# Altium PCB NIXIEClock_151223.PcbDoc (part 3 of 3)
Units mil, origin at the board's own origin, x right, y up, seen from the top; angles counter-clockwise.
Board outline 8470 x 2600 mil, 2 copper layers (Top Layer, Bottom Layer); 115 components, 157 nets, 483 pads, 249 vias.
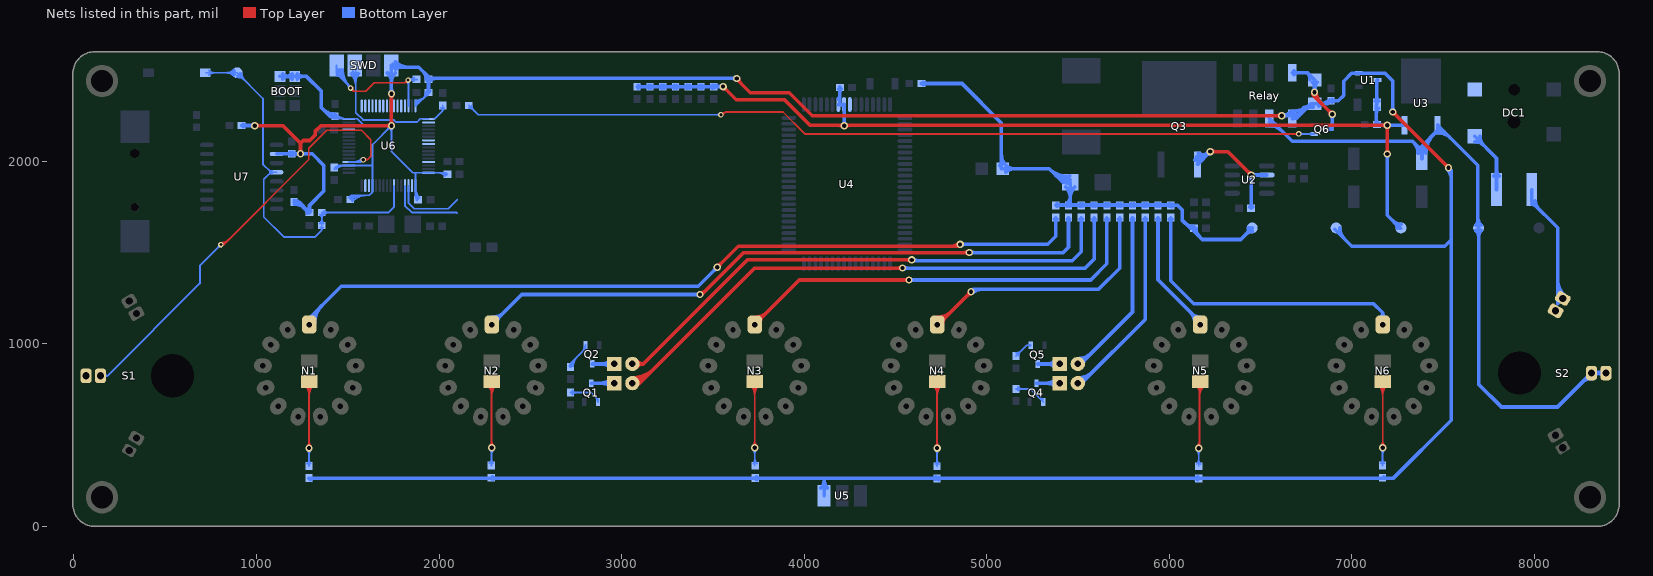
[diagram p3: the nets of this part, all layers, seen from the top]

## Via types
v1: diameter 30, hole 18, Top Layer to Bottom Layer, tented both sides, 204 vias
v2: diameter 40, hole 23, Top Layer to Bottom Layer, tented both sides, 35 vias
v3: diameter 30, hole 15, Top Layer to Bottom Layer, tented both sides, 10 vias

## Nets (pads, with @x,y where several pads share a name; then routed paths per layer and width w, separated by ;. In a path a pad name is that pad's centre, name@x,y a point inside that pad or via, vN(x,y) a via of type N, cw(c..) or ccw(c..) an arc to the next point about the centre after c; other vN are vias at no path point) (continued)
NetD3_1: D3.1 Q6.3 Relay.8 | length 894.1
  Top Layer w20: v2@6785,2378 ccw(c6816.38,2378) 6794.19,2355.81 ; v2@6788.18,2370.69 cw(c6773.55,2355) 6795,2355 ; v2(6795,2378) 6795,2355 ; v2@6801.82,2370.69 ccw(c6816.45,2355) 6795,2355 ; v2@6805,2378 ccw(c6884.67,2378) 6828.33,2321.67 ; v2@6882.31,2257.69 ccw(c6858.16,2257.69) 6875.24,2274.76 ccw(c6892.31,2291.84) v2@6892.31,2267.69 ; v2(6892.31,2257.69) 6795,2355
  Bottom Layer w20: Relay.8@6673,2485 6757,2485 ; Relay.8@6682.63,2475.37 cw(c6705.89,2452.11) 6705.89,2485 cw(c6705.89,2517.89) Relay.8@6682.63,2494.63 ; D3.1@6769.66,2447.38 ccw(c6725.44,2453.44) 6757,2485 ; D3.1@6784.63,2432.63 cw(c6759.58,2407.58) 6795,2407.58 ; v2@6787.93,2385.07 ccw(c6770.86,2402.14) 6795,2402.14 ccw(c6819.14,2402.14) v2@6802.07,2385.07 ; v2(6795,2378) D3.1@6795,2443 ; v2@6795,2397.92 cw(c6844.08,2397.92) D3.1@6809.37,2432.63 ; D3.1@6797,2445 6757,2485 ; D3.1@6799.26,2413.83 ccw(c6837.57,2403.57) v2@6803.57,2383.15 ; Q6.3@6880.31,2175 6892.31,2187 ; v2@6885.24,2250.62 cw(c6868.16,2233.55) 6892.31,2233.55 cw(c6916.45,2233.55) v2@6899.38,2250.62 ; Q6.3@6890.01,2174.94 cw(c6900.03,2179.27) 6892.31,2187 ; v2(6892.31,2257.69) 6892.31,2187
NetDC1_1: DC1.1 Fuse.1 | length 527.4
  Bottom Layer w20: DC1.1@7672.46,2107.87 cw(c7672.46,2036.97) 7722.6,2087.11 cw(c7772.74,2137.24) DC1.1@7701.83,2137.24 ; DC1.1@7672.46,2137.24 7792.54,2017.17 Fuse.1@7792.54,1845 ; Fuse.1@7778.74,1919.83 ccw(c7745.4,1953.17) 7792.54,1953.17 ccw(c7839.69,1953.17) Fuse.1@7806.35,1919.83
NetDS1_1: DS1.1 Q1.3 | length 236.6
  Bottom Layer w20: Q1.3@2833.82,785 DS1.1@2959,785 ; DS1.1@2938.23,764.23 ccw(c2888.09,714.09) 2888.09,785 ccw(c2888.09,855.91) DS1.1@2938.23,805.77
NetDS1_2: DS1.2 R5.1 | length 3463
  Top Layer w20: DS1.2@3059,774.37 ccw(c3059,845.28) 3109.14,795.14 ; DS1.2@3059,785 3099,785 ; DS1.2@3059,794.37 ccw(c3059,913.56) 3143.28,829.28 ; DS1.2@3059,814.37 ccw(c3059,981.84) 3177.42,863.42 ; DS1.2@3087.02,776.21 cw(c3099,772.45) 3099,785 ; DS1.2@3087.02,793.79 ccw(c3099,797.55) 3099,785 ; v2@4531.93,1407.93 ccw(c4514.86,1390.86) 4514.86,1415 ccw(c4514.86,1439.14) v2@4531.93,1422.07 ; v2(4539,1415) 3729,1415 3099,785
  Bottom Layer w20: v2(4539,1415) 5539,1415 5588,1464 R5.1@5588,1691.54 ; v2@4546.07,1407.93 cw(c4563.14,1390.86) 4563.14,1415 cw(c4563.14,1439.14) v2@4546.07,1422.07 ; R5.1@5581.15,1682.72 cw(c5564.62,1666.19) 5588,1666.19 cw(c5611.38,1666.19) R5.1@5594.85,1682.72
NetDS2_1: DS2.1 Q2.3 | length 229.7
  Bottom Layer w20: Q2.3@2840.71,890 DS2.1@2959,890 ; DS2.1@2938.23,869.23 ccw(c2888.09,819.09) 2888.09,890 ccw(c2888.09,960.91) DS2.1@2938.23,910.77
NetDS2_2: DS2.2 R6.1 | length 3096.9
  Top Layer w20: DS2.2@3059,890 3119,890 ; DS2.2@3082.2,871.99 cw(c3119,843.4) 3119,890 ; DS2.2@3082.2,908.01 ccw(c3119,936.6) 3119,890 ; v2@4581.93,1452.93 ccw(c4564.86,1435.86) 4564.86,1460 ccw(c4564.86,1484.14) v2@4581.93,1467.07 ; v2(4589,1460) 3689,1460 3119,890
  Bottom Layer w20: v2(4589,1460) 4594,1455 5469,1455 5518,1504 R6.1@5518,1691.54 ; v2@4596.07,1467.07 ccw(c4625.21,1496.21) 4625.21,1455 ; R6.1@5511.15,1682.72 cw(c5494.62,1666.19) 5518,1666.19 cw(c5541.38,1666.19) R6.1@5524.85,1682.72
NetDS3_1: DS3.1 Q4.3 | length 237.6
  Bottom Layer w20: Q4.3@5272.82,785 DS3.1@5399,785 ; DS3.1@5378.23,764.23 ccw(c5328.09,714.09) 5328.09,785 ccw(c5328.09,855.91) DS3.1@5378.23,805.77
NetDS3_2: DS3.2 R10.1 | length 1274.9
  Bottom Layer w20: DS3.2@5499,785 5519,785 5868,1134 R10.1@5868,1691.54 ; DS3.2@5499,794.37 ccw(c5499,865.28) 5549.14,815.14 ; DS3.2@5499,814.37 ccw(c5499,933.56) 5583.28,849.28 ; DS3.2@5528.37,785 cw(c5550.99,785) 5535,801 ; R10.1@5861.15,1682.72 cw(c5844.62,1666.19) 5868,1666.19 cw(c5891.38,1666.19) R10.1@5874.85,1682.72
NetDS4_1: DS4.1 Q5.3 | length 238.5
  Bottom Layer w20: Q5.3@5279.07,890 5350.22,890 ; DS4.1@5373.04,876.26 ccw(c5350.22,864.18) 5350.22,890 ; DS4.1@5373.04,903.74 cw(c5350.22,915.82) 5350.22,890 ; DS4.1@5378.23,869.23 ccw(c5328.09,819.09) 5328.09,890 ccw(c5328.09,960.91) DS4.1@5378.23,910.77
NetDS4_2: DS4.2 R11.1 | length 1128.5
  Bottom Layer w20: DS4.2@5499,890 5514,890 5798,1174 R11.1@5798,1691.54 ; DS4.2@5499,899.37 ccw(c5499,958.2) 5540.6,916.6 ; DS4.2@5499,919.37 ccw(c5499,1026.49) 5574.74,950.74 ; DS4.2@5528.37,890 cw(c5563.06,890) 5538.53,914.53 ; R11.1@5791.15,1682.72 cw(c5774.62,1666.19) 5798,1666.19 cw(c5821.38,1666.19) R11.1@5804.85,1682.72
NetF1_2: Fuse.2 S2.1 | length 941.9
  Bottom Layer w20: Fuse.2@7985.46,1764.45 cw(c7985.46,1732.84) Fuse.2@8007.81,1755.19 ; Fuse.2@7985.46,1845 7985.46,1777.54 8127.07,1635.93 8127.07,1221 S2.1@8155.22,1249.15 ; Fuse.2@8004.98,1783.98 ccw(c8067.66,1783.98) 8023.34,1739.66 ; 8127.07,1302.19 ccw(c8195.47,1302.19) S2.1@8147.11,1253.83 ; 8127.07,1350.47 ccw(c8243.75,1350.47) S2.1@8161.25,1267.97
NetLED1_1: LED1.1 R33.2 | length 824.2
  Top Layer w10: LED1.1@1267.48,771.39 cw(c1217.94,721.86) 1288,721.86 ; LED1.1@1274.55,778.47 cw(c1242.08,746) 1288,746 ; v2@1277.39,439.61 ccw(c1251.79,465.21) 1288,465.21 ccw(c1324.21,465.21) v2@1298.61,439.61 ; v2(1288,429) LED1.1@1288,791.91 ; 1288,717.03 cw(c1364.89,717.03) LED1.1@1310.52,771.39 ; 1288,741.17 cw(c1340.74,741.17) LED1.1@1303.45,778.47
  Top Layer w20: LED1.1@1288,791.91 LED1.1@1289,792.91
  Bottom Layer w10: R33.2@1276.62,343.82 ccw(c1249.13,371.3) 1288,371.3 ; v2@1277.39,418.39 cw(c1251.79,392.79) 1288,392.79 cw(c1324.21,392.79) v2@1298.61,418.39 ; R33.2@1288,331.46 v2(1288,429) ; 1288,366.47 ccw(c1320.04,366.47) R33.2@1297.38,343.82
NetLED2_1: LED2.1 R34.2 | length 820.8
  Top Layer w10: LED2.1@2267.48,771.39 cw(c2217.94,721.86) 2288,721.86 ; LED2.1@2274.55,778.47 cw(c2242.08,746) 2288,746 ; v2@2278.39,441.61 ccw(c2255.2,464.8) 2288,464.8 ; v2@2288,431 LED2.1@2288,791.91 ; 2288,469.63 ccw(c2327.63,469.63) v2@2299.61,441.61 ; 2288,717.03 cw(c2364.89,717.03) LED2.1@2310.52,771.39 ; 2288,741.17 cw(c2340.74,741.17) LED2.1@2303.45,778.47
  Bottom Layer w10: R34.2@2275.62,345.82 ccw(c2245.72,375.71) 2288,375.71 ; v2@2278.39,420.39 cw(c2255.2,397.2) 2288,397.2 ; R34.2@2288,333.46 v2@2288,431 ; 2288,366.06 ccw(c2316.62,366.06) R34.2@2296.38,345.82 ; 2288,392.37 cw(c2327.63,392.37) v2@2299.61,420.39
  other v2: 2289,431
NetLED3_1: LED3.1 R35.2 | length 833.2
  Top Layer w10: LED3.1@3707.48,771.39 cw(c3655.53,719.44) 3729,719.44 cw(c3802.47,719.44) LED3.1@3750.52,771.39 ; LED3.1@3714.55,778.47 cw(c3679.67,743.58) 3729,743.58 cw(c3778.33,743.58) LED3.1@3743.45,778.47 ; v2@3718.39,441.61 ccw(c3692.79,467.21) 3729,467.21 ccw(c3765.21,467.21) v2@3739.61,441.61 ; v2@3728,421 3728,431 3729,432 LED3.1@3729,792.91
  Bottom Layer w10: v2@3718.39,420.39 cw(c3692.79,394.79) 3729,394.79 cw(c3765.21,394.79) v2@3739.61,420.39 ; R35.2@3721.62,344.82 ccw(c3703.79,362.64) 3729,362.64 ; R35.2@3729,333.46 v2@3729,432 ; 3729,377.13 ccw(c3774.7,377.13) R35.2@3742.38,344.82
  other v2: 3729,431
NetLED4_1: LED4.1 R36.2 | length 824.8
  Top Layer w10: LED4.1@4707.48,771.39 cw(c4657.94,721.86) 4728,721.86 ; LED4.1@4714.55,778.47 cw(c4682.08,746) 4728,746 ; v2@4717.39,439.61 ccw(c4691.79,465.21) 4728,465.21 ccw(c4764.21,465.21) v2@4738.61,439.61 ; v2(4728,429) LED4.1@4728,791.91 ; 4728,717.03 cw(c4804.89,717.03) LED4.1@4750.52,771.39 ; 4728,741.17 cw(c4780.74,741.17) LED4.1@4743.45,778.47
  Bottom Layer w10: v2@4717.39,418.39 cw(c4691.79,392.79) 4728,392.79 cw(c4764.21,392.79) v2@4738.61,418.39 ; R36.2@4717.62,341.82 ccw(c4692.55,366.89) 4728,366.89 ccw(c4763.45,366.89) R36.2@4738.38,341.82 ; R36.2@4728,329.46 v2(4728,429)
NetLED5_1: LED5.1 R37.2 | length 846.4
  Top Layer w10: LED5.1@6147.48,771.39 cw(c6102.27,726.19) 6166.21,726.19 ; v2@6150.39,438.61 ccw(c6112.22,476.78) 6166.21,476.78 ; LED5.1@6154.55,778.47 cw(c6126.42,750.33) 6166.21,750.33 ; v2@6157.46,431.54 ccw(c6136.36,452.64) 6166.21,452.64 ; v2@6166.21,428 LED5.1@6166.21,790.12 ; 6166.21,451.65 ccw(c6184.65,451.65) v2@6171.61,438.61 ; 6166.21,712.7 cw(c6249.22,712.7) LED5.1@6190.52,771.39 ; 6166.21,736.84 cw(c6225.08,736.84) LED5.1@6183.45,778.47
  Bottom Layer w10: v2@6150.39,417.39 cw(c6124.79,391.79) 6161,391.79 cw(c6197.21,391.79) v2@6171.61,417.39 ; R37.2@6150.62,341.82 ccw(c6125.55,366.89) 6161,366.89 ccw(c6196.45,366.89) R37.2@6171.38,341.82 ; R37.2@6161,329.46 v2(6161,428)
NetLED6_1: LED6.1 R38.2 | length 820.8
  Top Layer w10: LED6.1@7147.48,771.39 cw(c7095.53,719.44) 7169,719.44 cw(c7242.47,719.44) LED6.1@7190.52,771.39 ; LED6.1@7154.55,778.47 cw(c7119.67,743.58) 7169,743.58 cw(c7218.33,743.58) LED6.1@7183.45,778.47 ; v2@7158.39,441.61 ccw(c7132.79,467.21) 7169,467.21 ccw(c7205.21,467.21) v2@7179.61,441.61 ; v2(7169,431) LED6.1@7169,792.91
  Bottom Layer w10: R38.2@7157.62,345.82 ccw(c7132.55,370.89) 7168,370.89 ccw(c7203.45,370.89) R38.2@7178.38,345.82 ; v2@7158.39,420.39 cw(c7135.2,397.2) 7168,397.2 ; R38.2@7168,333.46 v2@7168,430 ; 7168,392.37 cw(c7207.63,392.37) v2@7179.61,420.39
NetN1_1: N1.1 R12.1 | length 4773.3
  Top Layer w20: v2(3524,1420) 3639,1535 4844,1535 v2(4854,1545) ; v2@3524,1430 ccw(c3524,1454.14) 3541.07,1437.07 ccw(c3558.14,1420) v2@3534,1420 ; 4805.72,1535 ccw(c4805.72,1593.28) v2@4846.93,1552.07
  Bottom Layer w20: N1.1@1289,1105.91 1289,1140 1464,1315 3419,1315 v2(3524,1420) ; N1.1@1298.37,1115.75 cw(c1379.54,1115.75) 1322.14,1173.14 ; N1.1@1318.37,1115.75 cw(c1447.83,1115.75) 1356.29,1207.29 ; v2@3514,1420 cw(c3489.86,1420) 3506.93,1402.93 cw(c3524,1385.86) v2@3524,1410 ; v2(4854,1545) 5334,1545 5378,1589 R12.1@5378,1691.54 ; v2@4861.07,1537.93 cw(c4878.14,1520.86) 4878.14,1545 cw(c4878.14,1569.14) v2@4861.07,1552.07 ; R12.1@5371.15,1682.72 cw(c5354.62,1666.19) 5378,1666.19 cw(c5401.38,1666.19) R12.1@5384.85,1682.72
NetN2_1: N2.1 R13.1 | length 3835.1
  Top Layer w20: v2(3429,1270) 3439,1270 3669,1500 v2(4904,1500) ; v2@3429,1280 ccw(c3429,1328.28) 3463.14,1294.14 ; v2@4896.93,1492.93 ccw(c4879.86,1475.86) 4879.86,1500 ccw(c4879.86,1524.14) v2@4896.93,1507.07
  Bottom Layer w20: N2.1@2289,1105.91 2453.09,1270 v2(3429,1270) ; N2.1@2289,1125.12 ccw(c2289,1171.5) N2.1@2321.8,1138.7 ; N2.1@2289,1145.12 ccw(c2289,1239.79) 2355.94,1172.85 ; N2.1@2318.37,1115.75 cw(c2365.51,1115.75) 2332.18,1149.08 ; v2@3421.93,1262.93 ccw(c3404.86,1245.86) 3404.86,1270 ccw(c3404.86,1294.14) v2@3421.93,1277.07 ; v2@4904,1505 4909,1500 5419,1500 5448,1529 R13.1@5448,1691.54 ; v2@4911.07,1492.93 cw(c4928.14,1475.86) 4928.14,1500 cw(c4928.14,1524.14) v2@4911.07,1507.07 ; R13.1@5441.15,1682.72 cw(c5424.62,1666.19) 5448,1666.19 cw(c5471.38,1666.19) R13.1@5454.85,1682.72
NetN3_1: N3.1 R15.1 | length 2579.9
  Top Layer w20: N3.1@3729,1105.91 3973.09,1350 v2(4574,1350) ; N3.1@3729,1125.12 ccw(c3729,1171.5) N3.1@3761.8,1138.7 ; N3.1@3729,1145.12 ccw(c3729,1239.79) 3795.94,1172.85 ; N3.1@3758.37,1115.75 cw(c3805.51,1115.75) 3772.18,1149.08 ; v2@4566.93,1342.93 ccw(c4549.86,1325.86) 4549.86,1350 ccw(c4549.86,1374.14) v2@4566.93,1357.07
  Bottom Layer w20: v2(4574,1350) 5569,1350 5658,1439 R15.1@5658,1691.54 ; v2@4581.07,1342.93 cw(c4598.14,1325.86) 4598.14,1350 cw(c4598.14,1374.14) v2@4581.07,1357.07 ; R15.1@5651.15,1682.72 cw(c5634.62,1666.19) 5658,1666.19 cw(c5681.38,1666.19) R15.1@5664.85,1682.72
NetN4_1: N4.1 R16.1 | length 1697
  Top Layer w20: N4.1@4729,1105.91 4734.91,1105.91 v2(4914,1285) ; N4.1@4729,1125.12 ccw(c4729,1185.76) 4771.88,1142.88 ; N4.1@4729,1145.12 ccw(c4729,1254.04) 4806.02,1177.02 ; N4.1@4758.37,1115.75 cw(c4791.26,1115.75) N4.1@4768,1139 ; v2@4904,1285 cw(c4879.86,1285) 4896.93,1267.93 cw(c4914,1250.86) v2@4914,1275
  Bottom Layer w20: v2(4914,1285) 4929,1300 5614,1300 5728,1414 R16.1@5728,1691.54 ; v2@4921.07,1277.93 cw(c4974.36,1224.64) 4974.36,1300 ; R16.1@5721.15,1682.72 cw(c5704.62,1666.19) 5728,1666.19 cw(c5751.38,1666.19) R16.1@5734.85,1682.72
NetN5_1: N5.1 R24.1 | length 829.4
  Bottom Layer w20: R24.1@5931.15,1682.72 cw(c5914.62,1666.19) 5938,1666.19 cw(c5961.38,1666.19) R24.1@5944.85,1682.72 ; R24.1@5938,1691.54 5938,1351 6169,1120 N5.1@6169,1105.91 ; 6115.86,1173.14 cw(c6058.46,1115.75) N5.1@6139.63,1115.75 ; 6126.12,1162.88 ccw(c6169,1205.76) N5.1@6169,1145.12
NetN6_1: N6.1 R25.1 | length 1750.6
  Bottom Layer w20: R25.1@6001.15,1682.72 cw(c5984.62,1666.19) 6008,1666.19 cw(c6031.38,1666.19) R25.1@6014.85,1682.72 ; R25.1@6008,1691.54 6008,1346 6134,1220 7119,1220 7169,1170 ; N6.1@7152.94,1140.34 ccw(c7133.58,1170) 7169,1170 ; N6.1@7169,1105.91 7169,1170 ; N6.1@7185.06,1140.34 cw(c7204.42,1170) 7169,1170
NetQ1_1: Q1.1 R3.1 | length 258.4
  Bottom Layer w10: R3.1@2720,733.46 2833.54,733.46 2870.4,696.6 Q1.1@2870.4,681.82 ; R3.1@2730.38,723.08 cw(c2755.45,698.01) 2755.45,733.46 cw(c2755.45,768.92) R3.1@2730.38,743.85 ; 2855.28,711.72 cw(c2835.23,691.66) Q1.1@2863.59,691.66
NetQ2_1: Q2.1 R4.1 | length 308.3
  Bottom Layer w10: R4.1@2714.68,875.43 cw(c2744.26,875.43) 2723.35,896.35 ; R4.1@2720,873.46 2720,893 2802.49,975.49 Q2.1@2802.49,993.18 ; R4.1@2724.68,875.43 cw(c2778.41,875.43) 2740.42,913.42 ; R4.1@2734.69,875.43 cw(c2812.55,875.43) 2757.49,930.49 ; 2785.31,958.31 ccw(c2760.28,983.34) Q2.1@2795.68,983.34
NetQ3_1: Q3.1 R7.1 U2.2 | length 1127.6
  Top Layer w20: v2@6222,2053 v2(6224,2053) 6321,2053 v2(6449,1925) ; v2@6231.07,2045.93 cw(c6248.14,2028.86) 6248.14,2053 cw(c6248.14,2077.14) v2@6231.07,2060.07 ; v2@6439,1925 ccw(c6414.86,1925) 6431.93,1942.07 ccw(c6449,1959.14) v2@6449,1935
  Bottom Layer w20: Q3.1@6140.1,2007.21 ccw(c6157.87,2041.65) 6185.28,2014.25 ; Q3.1@6149.27,2024.98 ccw(c6171.05,2067.19) 6204.64,2033.61 ; Q3.1@6154,1982.97 v2(6224,2053) cw(c6184.23,2092.74) Q3.1@6158.44,2042.76 ; 6191.78,2026.18 ccw(c6167.56,2068.12) 6214.34,2055.59 cw(c6190.93,2061.86) 6203.05,2040.87 ; 6203.16,2040.94 cw(c6215.19,2020.11) v2@6221.41,2043.34 ; 6206.91,2035.88 ccw(c6189.78,2053) v2@6214,2053 ; 6206.98,2035.95 cw(c6224,2018.93) v2@6224,2043 ; R7.1@6441.62,1749.85 ccw(c6423.79,1767.67) 6449,1767.67 ; v2@6441.93,1917.93 cw(c6424.86,1900.86) 6449,1900.86 cw(c6473.14,1900.86) 6456.07,1917.93 cw(c6473.14,1900.86) 6473.14,1925 cw(c6473.14,1949.14) v2@6456.07,1932.07 ; R7.1@6449,1743 v2(6449,1925) U2.2@6533.49,1925 ; 6449,1765.09 ccw(c6470.55,1765.09) R7.1@6455.31,1749.85
NetQ4_1: Q4.1 R8.1 | length 266.3
  Bottom Layer w10: R8.1@5160,753.46 5237.76,753.46 Q4.1@5309.4,681.82 ; R8.1@5170.38,743.08 cw(c5195.45,718.01) 5195.45,753.46 cw(c5195.45,788.92) R8.1@5170.38,763.85 ; 5280.97,710.25 ccw(c5309.4,738.68) Q4.1@5309.4,698.47
NetQ5_1: Q5.1 R9.1 | length 187.3
  Bottom Layer w10: R9.1@5160,933.46 5218.72,992.18 Q5.1@5241.49,992.18 ; R9.1@5160,950.12 ccw(c5160,990.32) 5188.43,961.89 ; R9.1@5174.68,935.43 cw(c5205.39,935.43) 5183.68,957.14 ; Q5.1@5236.67,987.36 ccw(c5225.05,975.74) 5225.05,992.18 ccw(c5225.05,1008.62) Q5.1@5236.67,997
NetQ6_1: Q6.1 R32.2 | length 4919.4
  Top Layer w10: v1(3544,2255) 3554,2255 3569,2270 ; v1@3546.96,2264.55 ccw(c3553.47,2285.53) 3569,2270 ; v1@6701.93,2142.93 ccw(c6684.86,2125.86) 6684.86,2150 ccw(c6684.86,2174.14) v1@6701.93,2157.07 ; v1(6709,2150) 4004,2150 3884,2270 3569,2270
  Bottom Layer w10: R32.2@2162.46,2306 2213.46,2255 v1(3544,2255) ; R32.2@2164.43,2291.32 cw(c2164.43,2260.61) 2186.14,2282.32 ; R32.2@2179.12,2306 ccw(c2219.32,2306) 2190.89,2277.57 ; v1@3536.93,2247.93 ccw(c3519.86,2230.86) 3519.86,2255 ccw(c3519.86,2279.14) v1@3536.93,2262.07 ; v1@6709.59,2149.41 Q6.1@6793.69,2149.41 ; v1@6716.07,2142.93 cw(c6731.72,2127.28) 6731.72,2149.41 ; v1@6716.07,2157.07 ccw(c6734.57,2175.57) 6734.57,2149.41 ; Q6.1@6780.43,2145.99 ccw(c6772.16,2137.72) 6772.16,2149.41 ccw(c6772.16,2161.1) Q6.1@6780.43,2152.83
PA0: U6.14
PA1: U6.15
PA4: S1.2 U6.20 | length 2652.7
  Top Layer w10: v1@805,1554 ccw(c805,1614.36) 847.68,1571.68 ; 830.61,1554.61 cw(c805,1580.21) v1(805,1544) 820,1544 1286,2010 1286,2071 1385,2170 1575,2170 1626,2119 1626,2027 1608,2009 ; v1(1585,2009) 1608,2009 ; v1@1592.31,2002.18 cw(c1608,1987.55) 1608,2009 ; v1@1592.31,2015.82 ccw(c1608,2030.45) 1608,2009
  Bottom Layer w10: S1.2@145.3,825 184,825 ; S1.2@168.09,814.72 cw(c184,807.55) 184,825 ; S1.2@168.09,835.28 ccw(c184,842.45) 184,825 ; v1@795,1544 cw(c770.86,1544) 787.93,1526.93 cw(c805,1509.86) v1@805,1534 ; v1(805,1544) 690,1429 690,1331 184,825 ; U6.20@1505.5,1996.42 1572.42,1996.42 v1(1585,2009) cw(c1554.62,2039.38) 1554.62,1996.42 ; U6.20@1530.48,1996.42 ccw(c1530.48,2063.52) v1@1577.93,2016.07
PA8: U6.41
PA9: U6.42
PA10: U6.43
PA11: U6.44
PA12: U6.45
PA15: U6.50
PB3: U6.55
PB4: U6.56
PB8: U6.61
PB10: U6.29
PB11: U6.30
PB12: U6.33
PB13: U6.34
PB14: U6.35
PB15: U6.36
PC6: U6.37
PC7: U6.38
PC8: U6.39
PC9: U6.40
PC13: U6.2
PC14: U6.3 | length 395.8
  Bottom Layer w10: U6.3@1832.27,1866.5 1832.27,1772.73 1865,1740 2050,1740 2100,1790
PC15: U6.4 | length 414.1
  Bottom Layer w10: U6.4@1812.58,1866.5 1812.58,1757.42 1850,1720 2095,1720 2100,1715
RESET: C13.1 R29.1 RST.1 S3.1 U6.7 U7.4 | length 2736.8
  Bottom Layer w10: S3.1@724,2485 RST.1@894,2485 1035,2344 1035,1985 1074,1946 ; S3.1@738.07,2471.83 cw(c769.86,2440.04) 769.86,2485 cw(c769.86,2529.96) S3.1@738.07,2498.17 ; RST.1@876.32,2467.32 ccw(c833.64,2424.64) 833.64,2485 ccw(c833.64,2545.36) RST.1@876.32,2502.68 ; RST.1@883.39,2474.39 ccw(c857.79,2448.79) 857.79,2485 ccw(c857.79,2521.21) RST.1@883.39,2495.61 ; RST.1@894,2460 cw(c894,2399.64) 936.68,2442.32 cw(c979.36,2485) RST.1@919,2485 ; RST.1@894,2470 cw(c894,2433.79) 919.61,2459.39 cw(c945.21,2485) RST.1@909,2485 ; 1060.49,1922.49 cw(c1086.32,1896.65) U7.4@1086.32,1933.19 ; 1063.9,1956.1 ccw(c1086.32,1978.52) U7.4@1086.32,1946.81 ; U7.4@1080.56,1936.38 ccw(c1074,1932.26) U7.4@1074,1940 ; U7.4@1080.56,1943.62 cw(c1074,1947.74) U7.4@1074,1940 ; U7.4@1082.21,1945.43 cw(c1078.43,1950.43) 1074,1946 ; U7.4@1109.94,1940 U7.4@1074,1940 ; C13.1@1347.08,1659.38 ccw(c1322.01,1684.45) 1357.46,1684.45 ccw(c1392.92,1684.45) C13.1@1367.85,1659.38 ; R29.1@1347.08,1708.62 cw(c1322.01,1683.55) 1357.46,1683.55 cw(c1392.92,1683.55) R29.1@1367.85,1708.62 ; C13.1@1349.67,1636.56 cw(c1340.83,1622.47) 1357.46,1622.47 ; C13.1@1365.26,1636.56 ccw(c1374.09,1622.47) 1357.46,1622.47 ; R29.1@1369.82,1708.62 cw(c1394.89,1683.55) 1394.89,1719 cw(c1394.89,1754.45) R29.1@1369.82,1729.38 ; U6.7@1753.53,1866.5 1753.53,1750.53 1722,1719 R29.1@1357.46,1719 C13.1@1357.46,1649 1357.46,1622.46 ; 1074,1946 1074,1936 1040,1902 1040,1695 1149,1586 1321,1586 1357.46,1622.46
SWCLK: R27.2 SWD.2 U6.49 | length 1097.9
  Bottom Layer w10: SWD.2@1514.25,2480.25 cw(c1442.43,2408.43) 1544,2408.43 ; SWD.2@1521.32,2487.32 cw(c1466.57,2432.57) 1544,2432.57 cw(c1611.43,2432.57) SWD.2@1563.75,2480.25 ; SWD.2@1528.39,2494.39 cw(c1490.72,2456.72) 1544,2456.72 cw(c1587.28,2456.72) SWD.2@1556.68,2487.32 ; SWD.2@1539,2525 1544,2520 1544,2267 1584,2227 1752.25,2227 1764.25,2215 1879,2215 1896.64,2232.64 U6.49@1942.5,2232.64 ; U6.49@1972.03,2233.54 ccw(c1972.03,2246.85) 1981.44,2237.44 ; U6.49@1976.64,2232.64 2020,2276 ; R27.2@2011.45,2292.62 cw(c1999.56,2276) 2020,2276 ; R27.2@2020,2306.54 2020,2276 ; R27.2@2028.55,2292.62 ccw(c2040.44,2276) 2020,2276
SWDIO: R28.2 SWD.1 U6.46 | length 1375.1
  Top Layer w10: v1@1515.31,2391 cw(c1516.06,2367.06) 1533,2384 ; v1@1517,2400 1533,2384 ; v1@1525,2401 ccw(c1546.73,2401) 1531.36,2385.64 ; v1@1820.05,2444.04 cw(c1802.63,2442.37) 1815,2430 ; v1@1829.04,2435.05 ccw(c1827.37,2417.63) 1815,2430 ; v1(1830,2445) 1815,2430 ; 1533,2384 1599,2384 1645,2430 1815,2430
  Bottom Layer w10: SWD.1@1439,2470 cw(c1439,2445.86) 1456.07,2462.93 ; SWD.1@1439,2525 1439,2480 v1@1516.5,2402.5 ; SWD.1@1444,2505 ccw(c1516.43,2505) 1465.21,2453.79 ; SWD.1@1454,2505 ccw(c1550.57,2505) 1482.28,2436.72 ; SWD.1@1464,2505 ccw(c1584.71,2505) 1499.36,2419.64 ; SWD.1@1474,2505 ccw(c1618.85,2505) v1@1516.43,2402.57 ; 1495.81,2423.19 cw(c1473.62,2401) v1@1505,2401 ; 1499.77,2425.94 cw(c1474.34,2407.82) v1@1505.14,2402.65 ; 1503.05,2415.95 ccw(c1515,2427.9) v1@1515,2411 ; 1505.58,2417.78 ccw(c1519.48,2427.69) v1@1516.65,2410.86 ; v1@1822.93,2437.93 cw(c1800.38,2415.38) 1832.27,2415.38 ; U6.46@1832.27,2303.5 1832.27,2442.73 v1(1830,2445) 1832.42,2447.42 R28.2@1878.64,2447.42 ; 1832.27,2426.33 cw(c1848.67,2426.33) 1837.07,2437.93 cw(c1859.99,2415.01) R28.2@1859.99,2447.42 ; v1@1834.31,2447.42 ccw(c1834.31,2488.26) R28.2@1863.18,2459.38 ; v1@1835,2453.66 ccw(c1844.98,2470.94) 1850.14,2451.67 ; v1@1837.07,2452.07 ccw(c1848.29,2463.29) 1848.29,2447.42 ; v1@1838.66,2440 cw(c1863.19,2425.84) R28.2@1855.86,2453.2 ; v1@1839.35,2441.46 cw(c1846.03,2438.93) 1847.88,2445.83 ; v1@1841.92,2447.42 cw(c1841.92,2417.35) R28.2@1863.18,2438.62
  other v1: 1515,2401
V3.3: 3.3V.1 BOOT.1 BOOT.2 C3.2 C14.2 C15.2 C16.2 C17.2 C18.2 C19.2 C20.1 D3.2 R28.1 R29.2 R33.1 R34.1 R35.1 R36.1 R37.1 R38.1 R40.2 R41.2 Relay.1 SWD.4 U1.2 U5.3 U6.1 U6.13 U6.19 U6.32 U6.48 U6.64 U7.2 | length 23210
  Top Layer w20: v2(990,2195) 1145,2195 1241,2099 ; v2@997.07,2187.93 cw(c1014.14,2170.86) 1014.14,2195 cw(c1014.14,2219.14) v2@997.07,2202.07 ; v2@1233.93,2048.07 ccw(c1216.86,2065.14) 1241,2065.14 ccw(c1265.14,2065.14) v2@1248.07,2048.07 ; v2(1241,2041) 1241,2099 ; v2@1731.93,2187.93 ccw(c1714.86,2170.86) 1714.86,2195 ccw(c1714.86,2219.14) 1731.93,2202.07 ccw(c1714.86,2219.14) 1739,2219.14 ccw(c1763.14,2219.14) v2@1746.07,2202.07 ; v2@1731.93,2362.93 cw(c1714.86,2345.86) 1739,2345.86 cw(c1763.14,2345.86) v2@1746.07,2362.93 ; v2(1739,2370) v2(1739,2195) 1353,2195 1321,2163 1321,2142.64 1292.36,2114 1256,2114 1241,2099 ; v2(3631,2454) 3631,2450 3705,2376 3918,2376 4044,2250 v2@6615,2250 ; v2@3641,2454 ccw(c3674.8,2454) 3650.9,2430.1 ; 6589.44,2250 cw(c6589.44,2222.44) v2@6608.93,2241.93 ; 6594.27,2250 ccw(c6594.27,2270.73) v2@6608.93,2256.07 ; v2@7224,2260 cw(c7224,2235.86) 7241.07,2252.93 cw(c7258.14,2270) v2@7234,2270 ; v2(7224,2270) v2(7529,1965) ; v2@7519,1965 ccw(c7494.86,1965) 7511.93,1982.07 ccw(c7529,1999.14) v2@7529,1975
  Bottom Layer w10: C17.2@1425,1956.54 1445.2,1976.73 U6.19@1505.5,1976.73 1505.76,1977 1635,1977 ; C14.2@1426.24,2240.81 ccw(c1445.97,2260.53) C14.2@1445.97,2232.64 ; C17.2@1429.31,1964.12 cw(c1459.76,1933.67) 1459.76,1976.73 ; C14.2@1433.31,2247.88 ccw(c1470.11,2284.68) U6.32@1470.11,2232.64 ; C17.2@1436.38,1957.05 cw(c1483.9,1909.53) U6.19@1483.9,1976.73 ; C14.2@1440.38,2254.95 ccw(c1494.25,2308.82) U6.32@1494.25,2232.64 ; C14.2@1443.9,2232.64 U6.32@1505.5,2232.64 1552.36,2232.64 1590,2195 v2(1739,2195) ; C18.2@1504.6,1801.83 cw(c1533.99,1772.45) 1533.99,1814 ; C18.2@1511.67,1794.76 cw(c1558.13,1748.3) 1558.13,1814 ; C18.2@1514,1792 1536,1814 ; C18.2@1515.6,1805.68 ccw(c1515.92,1834.08) 1536,1814 ; C18.2@1518.75,1787.69 cw(c1582.27,1724.16) 1582.27,1814 ; C18.2@1525.82,1780.62 cw(c1606.41,1700.02) 1606.41,1814 ; C18.2@1529.84,1793.82 cw(c1551.87,1798.13) 1536,1814 ; 1629.89,1825.8 ccw(c1618.72,1836.97) U6.13@1634.51,1836.97 ; v2@1724,2195 cw(c1687.79,2195) 1713.39,2169.39 cw(c1739,2143.79) v2@1739,2180 ; v2@1728.39,2205.61 cw(c1702.79,2231.21) 1702.79,2195 cw(c1702.79,2158.79) 1728.39,2184.39 cw(c1702.79,2158.79) 1739,2158.79 cw(c1775.21,2158.79) v2@1749.61,2184.39 ; C19.2@1871.64,1804.97 ccw(c1899.53,1804.97) C19.2@1879.81,1785.24 ; C19.2@1871.64,1807.9 U6.1@1871.64,1866.5 1871.64,1937.36 ; 1871.64,1829.11 ccw(c1923.68,1829.11) C19.2@1886.88,1792.31 ; U6.1@1871.64,1853.25 ccw(c1947.82,1853.25) C19.2@1893.95,1799.38 ; U6.48@1871.64,2303.94 ccw(c1871.64,2307.07) U6.48@1873.86,2304.86 ; U6.48@1871.64,2313.94 ccw(c1871.64,2341.22) 1890.93,2321.93 ; U6.48@1871.64,2323.94 ccw(c1871.64,2375.36) 1908,2339 ; U6.48@1871.64,2333.94 ccw(c1871.64,2409.5) 1925.07,2356.07 ; U6.48@1872.86,2303.5 1872.86,2303.86 1942.46,2373.46 C15.2@1942.46,2376 ; 1912.24,2343.24 ccw(c1879.49,2376) C15.2@1925.81,2376 ; 1923.12,2354.12 cw(c1940.5,2336.74) C15.2@1940.5,2361.32 ; 1987.93,1937.36 cw(c1987.93,1873.36) C16.2@2033.18,1918.62 ; 2012.07,1937.36 cw(c2012.07,1897.5) C16.2@2040.25,1925.69 ; C16.2@2045.54,1929 2037.17,1937.36 U6.64@1942.5,1937.36 1856.64,1937.36 1739,2055 v2(1739,2195) ; 1536,1814 1618.09,1814 1635.42,1831.33 U6.13@1635.42,1866.5 1635.42,2091.42 v2(1739,2195)
  Bottom Layer w20: R40.2@918.46,2196 989,2196 v2(990,2195) ; R40.2@927.28,2189.15 cw(c943.81,2172.62) 943.81,2196 cw(c943.81,2219.38) R40.2@927.28,2202.85 ; 963.44,2196 cw(c963.44,2168.44) v2@982.93,2187.93 ; 968.27,2196 ccw(c968.27,2216.73) v2@982.93,2202.07 ; U7.2@1111.48,2041.54 C20.1@1193,2041.54 1240.46,2041.54 v2(1241,2041) 1305,2041 1369,1977 1369,1836.93 1290.54,1758.46 R29.2@1290.54,1719 ; BOOT.2@1129,2465 BOOT.1@1209,2465 1274,2465 1354,2385 1354,2295 1402.46,2246.54 C14.2@1430,2246.54 ; BOOT.2@1142.81,2451.19 cw(c1176.14,2417.86) 1176.14,2465 cw(c1176.14,2512.14) BOOT.2@1142.81,2478.81 ; C20.1@1186.15,2034.69 ccw(c1169.62,2018.15) 1169.62,2041.54 ccw(c1169.62,2064.92) C20.1@1186.15,2048.38 ; BOOT.1@1195.19,2451.19 ccw(c1161.86,2417.86) 1161.86,2465 ccw(c1161.86,2512.14) BOOT.1@1195.19,2478.81 ; C20.1@1199.85,2034.69 cw(c1216.38,2018.15) 1216.38,2041.54 cw(c1216.38,2064.92) C20.1@1199.85,2048.38 ; R41.2@1206,1764.88 cw(c1206,1671.56) R29.2@1271.99,1737.55 ; R41.2@1206,1776.54 1233,1776.54 1283.69,1725.85 ccw(c1267.15,1742.38) 1290.54,1742.38 ccw(c1313.92,1742.38) R29.2@1297.38,1725.85 ; R41.2@1206,1784.88 cw(c1206,1739.85) 1237.84,1771.69 ; R41.2@1212.85,1769.69 cw(c1229.38,1753.15) 1229.38,1776.54 cw(c1229.38,1799.92) R41.2@1212.85,1783.38 ; 1215.57,2041.54 cw(c1215.57,2015.57) v2@1233.93,2033.93 ; 1218.15,2041.54 ccw(c1218.15,2063.85) v2@1233.93,2048.07 ; BOOT.1@1222.81,2451.19 cw(c1256.14,2417.86) 1256.14,2465 cw(c1256.14,2512.14) BOOT.1@1222.81,2478.81 ; v2@1248.07,2033.93 cw(c1265.14,2016.86) 1265.14,2041 cw(c1265.14,2065.14) v2@1248.07,2048.07 ; 1255.95,1746.81 cw(c1230.99,1703.57) R29.2@1279.21,1716.49 ; 1270.64,1738.89 cw(c1250.75,1719) R29.2@1278.88,1719 ; R29.2@1275.39,1734.14 ccw(c1288.57,1747.31) R29.2@1288.57,1728.68 ; R33.1@1287,264.2 7225,263 7544,582 7544,1570 ; R33.1@1293.85,255.72 cw(c1314.33,235.23) 1314.33,264.2 ; 1363.1,2285.9 ccw(c1430,2352.8) C14.2@1430,2258.19 ; 1397.24,2251.76 ccw(c1430,2284.51) C14.2@1430,2238.19 ; C14.2@1423.15,2239.69 ccw(c1406.62,2223.15) 1406.62,2246.54 ccw(c1406.62,2269.92) C14.2@1423.15,2253.38 ; SWD.4@1717.79,2483.79 cw(c1666.57,2432.57) 1739,2432.57 cw(c1811.43,2432.57) SWD.4@1760.21,2483.79 ; v2@1731.93,2377.07 ccw(c1714.86,2394.14) 1739,2394.14 ccw(c1763.14,2394.14) v2@1746.07,2377.07 ; v2(1739,2370) SWD.4@1739,2525 1749,2515 1889,2515 1942.46,2461.54 R28.1@1942.46,2454 ; SWD.4@1746.07,2532.07 ccw(c1787.28,2573.28) 1787.28,2515 ccw(c1787.28,2476.72) SWD.4@1760.21,2503.79 ; SWD.4@1760.21,2546.21 ccw(c1835.57,2621.57) 1835.57,2515 ; 1913.71,2490.29 cw(c1872.41,2449) R28.1@1930.81,2449 ; C15.2@1935.62,2382.85 ccw(c1919.08,2399.38) 1942.46,2399.38 ccw(c1965.85,2399.38) C15.2@1949.31,2382.85 ; R28.1@1935.62,2442.15 cw(c1919.08,2425.62) 1942.46,2425.62 cw(c1965.85,2425.62) R28.1@1949.31,2442.15 ; C15.2@1942.46,2376 R28.1@1942.46,2454 ; R28.1@1951.28,2442.15 cw(c1979.89,2413.55) 1979.89,2454 ; v2@3623.93,2446.93 ccw(c3606.86,2429.86) 3606.86,2454 ccw(c3606.86,2478.14) v2@3623.93,2461.07 ; v2(3631,2454) R28.1@1942.46,2454 ; U5.3@4091.32,210.68 ccw(c4048.64,253.36) 4109,253.36 ccw(c4169.36,253.36) U5.3@4126.68,210.68 ; U5.3@4109,168 4109,263 ; 4702.21,263.51 ccw(c4702.21,290.3) R36.1@4721.15,271.35 ; 4707.03,263.51 cw(c4707.02,243.54) R36.1@4721.15,257.66 ; R36.1@4734.85,255.69 cw(c4753.72,236.81) 4753.73,263.5 ; R36.1@4734.85,269.38 ccw(c4749.04,283.57) 4749.04,263.5 ; 6134.51,263.22 ccw(c6134.51,291) R37.1@6154.15,271.35 ; 6135.98,263.22 cw(c6135.97,237.52) R37.1@6154.15,255.69 ; 6139.26,263.22 ccw(c6139.26,284.28) R37.1@6154.15,269.39 ; 6140.73,263.22 cw(c6140.72,244.24) R37.1@6154.15,257.66 ; v2@6621,2257.66 ccw(c6633.07,2278.57) 6639.32,2255.25 ccw(c6645.57,2231.93) v2@6624.66,2244 ; v2@6623.07,2241.93 cw(c6640.14,2224.86) 6640.14,2249 cw(c6640.14,2273.14) v2@6623.07,2256.07 ; Relay.1@6659,2249 v2(6616,2249) ccw(c6616,2312.41) Relay.1@6662.92,2269.75 ; Relay.1@6672.57,2234.22 ccw(c6673.35,2282.15) 6707.25,2248.25 ; Relay.1@6672.9,2254.21 ccw(c6674.42,2347.83) 6740.62,2281.62 ; Relay.1@6673,2235 6694,2235 D3.2@6774,2315 ; Relay.1@6673.22,2274.21 ccw(c6675.49,2413.5) D3.2@6774,2315 ; 6733.58,2291.66 cw(c6765.79,2235.86) D3.2@6782.47,2298.1 ; 6734.93,2275.93 cw(c6787,2223.87) D3.2@6787,2297.5 ; D3.2@6819.37,2302.63 cw(c6849.25,2272.75) 6849.25,2315 cw(c6849.25,2357.25) D3.2@6819.37,2327.37 ; D3.2@6826.45,2315 ccw(c6826.45,2388.12) C3.2@6878.15,2336.42 ; C3.2@6891.85,2324.69 cw(c6908.38,2308.15) 6908.38,2331.54 cw(c6908.38,2354.92) C3.2@6891.85,2338.38 ; 3.3V.1@6906.5,1627.5 6999,1535 7509,1535 7544,1570 ; 3.3V.1@6934,1635 ccw(c7018.5,1635) 6958.75,1575.25 ; v2@7216.93,2277.07 ccw(c7199.86,2294.14) 7224,2294.14 ccw(c7248.14,2294.14) v2@7231.07,2277.07 ; v2(7224,2270) 7224,2440 7181,2483 7042,2483 7041.4,2482.4 U1.2@7037.82,2482.4 6998.4,2482.4 6955,2439 6955,2361 6925.54,2331.54 C3.2@6885,2331.54 6868.46,2315 D3.2@6797,2315 D3.2@6774,2315 ; v2@7521.93,1957.93 cw(c7468.64,1904.64) 7544,1904.64 ; v2(7529,1965) 7544,1950 7544,1570 ; R34.1@2292.85,257.72 cw(c2308.01,242.55) 2308.01,264 ccw(c2308.01,242.55) R34.1@2292.85,257.72 ; R34.1@2292.85,271.41 ccw(c2310.75,289.31) 2310.75,264 cw(c2310.75,289.31) R34.1@2292.85,271.41 ; R35.1@3738.85,256.72 cw(c3755.72,239.84) 3755.72,263.7 ccw(c3755.72,239.84) R35.1@3738.85,256.72 ; R35.1@3738.85,270.41 ccw(c3755.05,286.6) 3755.04,263.7 cw(c3755.05,286.6) R35.1@3738.85,270.41 ; R38.1@7174.85,271.41 ccw(c7195.14,291.7) 7195.14,263.01 cw(c7195.14,291.7) R38.1@7174.85,271.41
V5: 5V.1 C5.1 C8.2 C10.2 R17.1 R18.1 R19.1 R20.1 R21.1 R22.1 R23.1 U1.3 U3.2 U4.31 U4.32 U4.33 | length 6599.2
  Top Layer w20: v2@3556,2399 cw(c3556,2374.86) 3573.07,2391.93 cw(c3590.14,2409) v2@3566,2409 ; v2(3556,2409) 3628,2337 3892,2337 4031.48,2197.52 v2(7194,2197.52) v2(7194,2040) ; 4188.77,2197.52 cw(c4188.77,2164.77) v2@4211.93,2187.93 ; v2@4226.07,2187.93 cw(c4249.23,2164.77) 4249.23,2197.52 ; v2@7186.93,2047.07 ccw(c7169.86,2064.14) 7194,2064.14 ccw(c7218.14,2064.14) v2@7201.07,2047.07 ; v2@7186.93,2204.59 cw(c7169.86,2221.66) 7169.86,2197.52 cw(c7169.86,2173.38) 7186.93,2190.45 cw(c7169.86,2173.38) 7194,2173.38 cw(c7218.14,2173.38) v2@7201.07,2190.45
  Bottom Layer w20: R17.1@3085,2408.46 R18.1@3155,2408.46 R19.1@3225,2408.46 R20.1@3295,2408.46 R21.1@3365,2408.46 R22.1@3435,2408.46 R23.1@3505,2408.46 R23.1@3506.54,2410 ; R17.1@3091.85,2401.62 cw(c3108.38,2385.08) 3108.38,2408.46 cw(c3108.38,2431.85) R17.1@3091.85,2415.31 ; R18.1@3148.15,2401.62 ccw(c3131.62,2385.08) 3131.62,2408.46 ccw(c3131.62,2431.85) R18.1@3148.15,2415.31 ; R18.1@3161.85,2401.62 cw(c3178.38,2385.08) 3178.38,2408.46 cw(c3178.38,2431.85) R18.1@3161.85,2415.31 ; R19.1@3218.15,2401.62 ccw(c3201.62,2385.08) 3201.62,2408.46 ccw(c3201.62,2431.85) R19.1@3218.15,2415.31 ; R19.1@3231.85,2401.62 cw(c3248.38,2385.08) 3248.38,2408.46 cw(c3248.38,2431.85) R19.1@3231.85,2415.31 ; R20.1@3288.15,2401.62 ccw(c3271.62,2385.08) 3271.62,2408.46 ccw(c3271.62,2431.85) R20.1@3288.15,2415.31 ; R20.1@3301.85,2401.62 cw(c3318.38,2385.08) 3318.38,2408.46 cw(c3318.38,2431.85) R20.1@3301.85,2415.31 ; R21.1@3358.15,2401.62 ccw(c3341.62,2385.08) 3341.62,2408.46 ccw(c3341.62,2431.85) R21.1@3358.15,2415.31 ; R21.1@3371.85,2401.62 cw(c3388.38,2385.08) 3388.38,2408.46 cw(c3388.38,2431.85) R21.1@3371.85,2415.31 ; R22.1@3428.15,2401.62 ccw(c3411.62,2385.08) 3411.62,2408.46 ccw(c3411.62,2431.85) R22.1@3428.15,2415.31 ; R22.1@3441.85,2401.62 cw(c3458.38,2385.08) 3458.38,2408.46 cw(c3458.38,2431.85) R22.1@3441.85,2415.31 ; R23.1@3498.15,2401.62 ccw(c3481.62,2385.08) 3481.62,2408.46 ccw(c3481.62,2431.85) R23.1@3498.15,2415.31 ; R23.1@3511.54,2410 v2@3556,2410 ; R23.1@3511.85,2403.58 cw(c3527.34,2388.1) 3527.34,2410 ; R23.1@3511.85,2417.28 ccw(c3529.43,2434.86) 3529.43,2410 cw(c3529.44,2382.44) v2@3548.93,2401.93 ; 3534.27,2410 ccw(c3534.27,2430.73) v2@3548.93,2416.07 ; U4.31@4186.17,2341.14 ccw(c4163.56,2363.74) 4195.54,2363.74 ; U4.31@4187.23,2310.35 cw(c4194.04,2300.59) 4199.99,2310.89 ; C10.2@4188.69,2397.15 cw(c4172.15,2380.62) 4195.54,2380.62 cw(c4218.92,2380.62) C10.2@4202.38,2397.15 ; C10.2@4195.54,2409 U4.31@4195.54,2313.46 ; 4199,2310 U4.31@4195.54,2313.46 ; v2@4211.93,2202.07 ccw(c4194.86,2219.14) 4219,2219.14 ccw(c4243.14,2219.14) v2@4226.07,2202.07 ; U4.32@4217.77,2311.69 cw(c4207.69,2325.62) U4.31@4195.54,2313.46 ; U4.32@4218.25,2311.02 4219,2310.28 v2(4219,2195) ; C8.2@7128.65,2207.85 ccw(c7115.73,2220.77) 7134,2220.77 ; C5.1@7128.91,2330.05 ccw(c7109.02,2349.95) 7137.15,2349.95 ccw(c7165.28,2349.95) C5.1@7145.39,2330.05 ; 7134,2227.99 ccw(c7162.49,2227.99) C8.2@7142.34,2207.85 ; 7134,2262.45 cw(c7172.89,2262.45) C5.1@7145.39,2289.95 ; C8.2@7135.23,2198.77 7134,2200 7134,2306.85 C5.1@7137.15,2310 7137.15,2441.97 U1.3@7140.18,2445 ; U1.3@7137.15,2433.31 cw(c7151.87,2433.31) U1.3@7141.46,2443.72 ; C8.2@7139,2197.52 v2(7194,2197.52) U3.2@7288.45,2197.52 ; C8.2@7146.28,2207.85 ccw(c7171.22,2232.78) 7171.22,2197.52 ; v2@7186.93,2032.93 cw(c7169.86,2015.86) 7194,2015.86 cw(c7218.14,2015.86) v2@7201.07,2032.93 ; v2@7186.93,2190.45 ccw(c7169.86,2173.38) 7169.86,2197.52 ccw(c7169.86,2221.66) v2@7186.93,2204.59 ; v2(7194,2040) 7194,1705 5V.1@7266.5,1632.5 ; v2@7201.07,2190.45 cw(c7218.14,2173.38) 7218.14,2197.52 cw(c7218.14,2221.66) v2@7201.07,2204.59 ; 7226.32,1672.68 ccw(c7269,1715.36) 5V.1@7269,1655 ; 7238.39,1660.61 cw(c7212.79,1635) 5V.1@7249,1635
V12: 12V.1 C6.1 Relay.2 S2.2 U3.1 | length 4423.4
  Bottom Layer w20: Relay.2@6547.02,2195.79 cw(c6547.02,2098.99) 6615.46,2167.44 ; Relay.2@6547.02,2215.79 cw(c6547.02,2167.28) 6581.32,2201.58 ; Relay.2@6547.02,2235.79 cw(c6547.02,2235.56) Relay.2@6547.18,2235.72 ; Relay.2@6550.02,2232.88 6672.9,2110 7332,2110 C6.1@7384,2058 ; 7338,2104 cw(c7278.84,2044.84) C6.1@7362.5,2044.84 ; C6.1@7365.5,2044.84 cw(c7412.94,2044.84) 7379.39,2078.39 ; C6.1@7372.86,2063.23 ccw(c7360.88,2083) 7384,2083 ; C6.1@7384,2014.33 7384,2083 ; C6.1@7385.5,2044.84 cw(c7481.23,2044.84) 7413.54,2112.54 ; C6.1@7395.14,2063.23 cw(c7407.12,2083) 7384,2083 ; C6.1@7405.5,2044.84 cw(c7549.51,2044.84) 7447.68,2146.68 ; 7450.38,2149.38 cw(c7469.55,2130.22) 7469.55,2157.32 cw(c7469.55,2058.04) 7539.76,2128.24 ; U3.1@7469.55,2177.32 cw(c7469.55,2126.32) 7505.62,2162.38 ; U3.1@7469.55,2197.32 cw(c7469.55,2194.6) U3.1@7471.47,2196.53 ; U3.1@7469.55,2197.52 7469.55,2168.55 7384,2083 ; U3.1@7470,2199 7470,2198 7689,1979 12V.1@7689,1645 ; 12V.1@7679.86,1620.86 cw(c7645.72,1586.72) 7694,1586.72 cw(c7742.28,1586.72) 12V.1@7708.14,1620.86 ; 12V.1@7679.86,1649.14 ccw(c7657.79,1671.21) 7689,1671.21 ; 7689,1695.36 ccw(c7754.36,1695.36) 12V.1@7708.14,1649.14 ; 12V.1@7694,1635 7694,779 7819,654 8126.7,654 S2.2@8312.7,840 ; 8262.56,789.86 cw(c8312.7,739.72) S2.2@8312.7,810.63 ; S2.2@8285.18,812.48 ccw(c8267.04,830.63) S2.2@8292.7,830.63 ; S2.2@8312.7,842.3 S2.2@8389.14,842.3 ; S2.2@8326.84,825.86 cw(c8366.54,786.16) S2.2@8366.54,842.3 ; S2.2@8326.84,854.14 ccw(c8355.43,882.73) 8355.43,842.3 ; S2.2@8337.61,842.3 cw(c8337.61,786.16) S2.2@8377.3,825.86 ; 8348.71,842.3 ccw(c8348.71,882.73) S2.2@8377.3,854.14
VH: C4.1 D1.2 R2.1 R5.2 R6.2 R10.2 R11.2 R12.2 R13.2 R14.2 R15.2 R16.2 R24.2 R25.2 VH.1 | length 4173.5
  Bottom Layer w20: R14.2@4642.46,2426 4864,2426 5080,2210 5080,1959 5342,1959 ; R14.2@4651.28,2419.15 cw(c4667.81,2402.62) 4667.81,2426 cw(c4667.81,2449.38) R14.2@4651.28,2432.85 ; C4.1@5070.32,1976.68 ccw(c5046.96,2000.04) 5080,2000.04 ; 5080,2038.67 ccw(c5167.67,2038.67) 5105.68,1976.68 ccw(c5148.36,2019.36) 5148.36,1959 ccw(c5148.36,1898.64) C4.1@5105.68,1941.32 ; 5371.82,1929.18 ccw(c5445.46,2002.81) D1.2@5455.89,1899.2 ; R12.2@5378,1758.46 5380.54,1761 R13.2@5448,1761 ; R12.2@5384.85,1753.58 cw(c5402.75,1735.68) 5402.75,1761 ; R12.2@5384.85,1767.28 ccw(c5400.01,1782.45) 5400.01,1761 ; 5401.64,1899.36 ccw(c5450.91,1948.63) D1.2@5457.89,1879.3 ; 5423.25,1761 cw(c5423.25,1735.68) R13.2@5441.15,1753.58 ; 5425.99,1761 ccw(c5425.99,1782.45) 5441.15,1767.28 ccw(c5401.88,1806.55) 5457.42,1806.55 ; D1.2@5432.47,1859.06 cw(c5372.25,1798.84) 5457.42,1798.84 cw(c5542.58,1798.84) D1.2@5482.36,1859.06 ; D1.2@5453.88,1919.1 cw(c5440.01,2057) 5342,1959 ; R13.2@5454.85,1753.58 cw(c5472.75,1735.68) 5472.75,1761 ; R13.2@5454.85,1767.28 ccw(c5470.01,1782.45) 5470.01,1761 ; 5493.25,1761 cw(c5493.25,1735.68) R6.2@5511.15,1753.58 ; 5495.99,1761 ccw(c5495.99,1782.45) R6.2@5511.15,1767.28 ; R6.2@5524.85,1753.58 cw(c5542.75,1735.68) 5542.75,1761 ; R6.2@5524.85,1767.28 ccw(c5540.01,1782.45) 5540.01,1761 ; 5563.25,1761 cw(c5563.25,1735.68) R5.2@5581.15,1753.58 ; 5565.99,1761 ccw(c5565.99,1782.45) R5.2@5581.15,1767.28 ; R5.2@5594.85,1753.58 cw(c5612.75,1735.68) 5612.75,1761 ; R5.2@5594.85,1767.28 ccw(c5610.01,1782.45) 5610.01,1761 ; 5630.42,1762.42 5629,1761 ; R15.2@5664.85,1753.58 cw(c5682.75,1735.68) 5682.75,1761 ; R15.2@5664.85,1767.28 ccw(c5680.01,1782.45) 5680.01,1761 ; 5703.25,1761 cw(c5703.25,1735.68) R16.2@5721.15,1753.58 ; 5705.99,1761 ccw(c5705.99,1782.45) R16.2@5721.15,1767.28 ; R16.2@5734.85,1753.58 cw(c5752.75,1735.68) 5752.75,1761 ; R16.2@5734.85,1767.28 ccw(c5750.01,1782.45) 5750.01,1761 ; 5773.25,1761 cw(c5773.25,1735.68) R11.2@5791.15,1753.58 ; 5775.99,1761 ccw(c5775.99,1782.45) R11.2@5791.15,1767.28 ; R11.2@5804.85,1753.58 cw(c5822.75,1735.68) 5822.75,1761 ; R11.2@5804.85,1767.28 ccw(c5820.01,1782.45) 5820.01,1761 ; 5843.25,1761 cw(c5843.25,1735.68) R10.2@5861.15,1753.58 ; 5845.99,1761 ccw(c5845.99,1782.45) R10.2@5861.15,1767.28 ; R10.2@5874.85,1753.58 cw(c5892.75,1735.68) 5892.75,1761 ; R10.2@5874.85,1767.28 ccw(c5890.01,1782.45) 5890.01,1761 ; 5913.25,1761 cw(c5913.25,1735.68) R24.2@5931.15,1753.58 ; 5915.99,1761 ccw(c5915.99,1782.45) R24.2@5931.15,1767.28 ; R24.2@5944.85,1753.58 cw(c5962.75,1735.68) 5962.75,1761 ; R24.2@5944.85,1767.28 ccw(c5960.01,1782.45) 5960.01,1761 ; 5983.25,1761 cw(c5983.25,1735.68) R25.2@6001.15,1753.58 ; 5985.99,1761 ccw(c5985.99,1782.45) R25.2@6001.15,1767.28 ; R25.2@6008,1758.46 6045.54,1758.46 6070,1734 6070,1678 6115,1633 R2.1@6134.54,1633 6134.54,1618.46 6181,1572 6391,1572 VH.1@6446.5,1627.5 ; R25.2@6008,1761 5629,1761 ; R25.2@6014.85,1751.62 cw(c6031.38,1735.08) 6031.38,1758.46 cw(c6031.38,1781.85) R25.2@6014.85,1765.31 ; 6086.04,1661.96 ccw(c6132.57,1708.48) R2.1@6132.57,1642.69 ; R2.1@6146.19,1633 ccw(c6209.42,1633) 6164.71,1588.29 ; VH.1@6434,1635 cw(c6385.72,1635) 6419.86,1600.86 cw(c6454,1566.72) VH.1@6454,1615 ; VH.1@6439,1635 VH.1@6446.5,1627.5 ; VH.1@6454,1620 VH.1@6446.5,1627.5 ; VH.1@6454,1635 VH.1@6446.5,1627.5 ; 5342,1959 5416,1885 5456.42,1885 D1.2@5457.42,1884 5457.42,1761.58 5458,1761 5629,1761 ; 5633.25,1761 cw(c5633.25,1735.68) R15.2@5651.15,1753.58 ; 5633.25,1761 cw(c5633.25,1735.68) R15.2@5651.15,1753.58 ; 5633.25,1761 cw(c5633.25,1735.68) R15.2@5651.15,1753.58 ; 5635.99,1761 ccw(c5635.99,1782.45) R15.2@5651.15,1767.28 ; 5635.99,1761 ccw(c5635.99,1782.45) R15.2@5651.15,1767.28 ; 5635.99,1761 ccw(c5635.99,1782.45) R15.2@5651.15,1767.28
pads on no net: BT1.0 DC1.0 N1.2 N1.13 N2.2 N2.13 N3.2 N3.13 N4.2 N4.13 N5.2 N5.13 N6.2 N6.13 Relay.4 Relay.5 Relay.6 Relay.7 S1.1 S1.4 S2.3 S2.4 T1.1 T2.1 T3.1 T4.1 U4.36 U4.37 U4.38 U4.39 U4.41 U4.42 U4.43 U4.44 U7.1

## Polygon pours and split planes (outlines as drawn)
GND on Bottom Layer "Bottom Layer-No Net" (solid, pour order 9): 8443,1300 7720,1300 7720,380 8443,380
DGND on Bottom Layer "Bottom Layer-No Net" (solid, remove dead copper, pour order 8): 2229,2600 2229,1480 740,1480 739,1479 739,340 -6,340 -10,344 -10,2600
GND on Bottom Layer "Bottom Layer-No Net" (hatched 90Degree grid 20 track 8, remove dead copper, pour order 13): 2229,2599 2230,2600 8465,2600 8465,0 -5,0 -5,341 -4,340 739,340 739,1480 2230,1480
GND on Top Layer "Bottom Layer-No Net" (solid, remove dead copper, pour order 7): 8465,2600 2229,2600 2229,1481 739,1481 739,339 -6,339 -5,338 -5,0 8464,0
DGND on Top Layer "Bottom Layer-No Net" (solid, remove dead copper, pour order 10): -6,339 -5.95,339.05 739,339.05 739,1481 2229,1481 2229,2600 -10,2600

## Keep-outs
Bottom Layer:
  lines w15 net GND: 2590,517 2685,607
Keep-Out Layer:
  the board outline again, w10

## Other copper
Bottom Layer:
  rectangle net INFRARED_DATA: 4274,94 4286,121
  rectangle net GND: 4913,1574 5153,1674
  rectangle net GND: 5073,486 5820,633
  rectangle net GND: 2644,566 2649,571
  rectangle net GND: 2597,511 2607,531
  rectangle net GND: 2613,509 2630,546
  rectangle net GND: 2632,551 2638,558
  rectangle net GND: 2655,573 2662,584
  rectangle net GND: 2669,593 2676,602
  rectangle net GND: 2637,551 2650,566
  rectangle net GND: 2662,571 2676,594
  rectangle net GND: 2582,510 2590,517
  rectangle net GND: 2590,509 2603,524
  rectangle net GND: 2604,509 2626,540
  rectangle net GND: 2627,507 2650,554
  rectangle net GND: 2649,507 2680,576
  rectangle net GND: 2680,507 3459,617
  rectangle net PC14: 2065,1750 2080,1760
  rectangle net PC14: 2075,1750 2095,1770
  rectangle net GND: 8080,1900 8372,2000
  rectangle net GND: 2397,2301 3020,2418
  rectangle net GND: 705,24 3340,130
  rectangle net GND: 4375,24 7720,125
  rectangle net GND: 2438,1470 3571,1942
  rectangle net PC15: 2085,1675 2150,1730
  rectangle net PC14: 2085,1750 2150,1805
  rectangle net NetDC1_1: 7635,2145 7710,2430
  region net V5: 4254,2340 4184,2340 4184,2275 4254,2275
  region net V12: 8413,878 8297,878 8297,803 8413,803
  region net NetF1_2: 8189,1241 8128.38,1276 8075.38,1184.2 8136,1149.2
  region net DGND: 1139,1895 1079,1895 1079,1735 1139,1735
  region net DGND: 759,1940 694,1940 694,1735 759,1735
  region net PA4: 170,858 47,858 47,786 170,786
  rectangle net DGND: 1099,2275 1239,2335
  rectangle net V3.3: 1099,2435 1239,2495
  region net NetC7_1: 6379,1975 6309,1975 6309,1870 6379,1870
  region net DGND: 316.5,1274.59 259.25,1241.54 316.75,1141.94 374,1175
  rectangle net \I\N\T\/SQW: 1250,1830 1325,1915
  rectangle net GND: 3906,316 4504,419
  rectangle net PA4: 165,831 195,842
  rectangle net PA4: 178,825 184,836

## Silkscreen, mask and mechanical layers (free items; w line width, h text height)
Top Overlay:
  text "Nothing gold can stay." at 3345,1750 h200
Bottom Overlay:
  drawing of 177 lines, arcs and shapes, not listed
  text "SWD" at 1879,2545 h30
  text "VCC" at 1209,2505 h30
  text "-" at 6731,2470 h30
  text "DIO" at 1469,2425 h30
  text "CLK" at 1579,2425 h30
  text "GND" at 1684,2425 h30
  text "3.3V" at 1779,2425 h30
  text "B1" at 1064,2370 h30
  text "B0" at 1314,2370 h30
  text "GND" at 1209,2230 h30
  text "+" at 6729,2221 h30
  text "INT" at 1315,1920 h25
  text "JLCJLCJLCJLC" at 440,1880 h20
  text "DGND" at 2080,1840 h25
  text "PC14" at 2080,1765 h25
  text "PC15" at 2080,1690 h25
  text "Anode" at 1371,1237 h60
  text "Anode" at 2366,1237 h60
  text "Anode" at 3813,1237 h60
  text "Anode" at 4809,1237 h60
  text "Anode" at 6249,1237 h60
  text "Anode" at 7248,1237 h60
  text "VCC" at 4151,249 h30
  text "GND" at 4251,249 h30
  text "OUT" at 4350,249 h30
Top Solder:
  drawing of 38704 lines, arcs and shapes, not listed
  text "OFF" at 7800,1190 h160
  text "TIME" at 385,1165 h160
  text "ON" at 7825,390 h170
  text "DATE" at 395,360 h140
Bottom Solder:
  drawing of 2170 lines, arcs and shapes, not listed
  text "Reset" at 880,2385 h60
  text "Pull-Up Resistors" at 2995,2340 h80
  text "12V DC" at 8344,1927 h80
  text "ИН-14" at 3490,1865 h80
  text "KEEP" at 2690,1835 h110
  text "DANGER" at 3210,1820 h150
  text "NIXIE CLOCK" at 3543,1805 h65
  text "CALM" at 2705,1750 h110
  text "AND" at 2675,1675 h95
  text "DS3231" at 1000,1621 h80
  text "Boost" at 5118,1599 h80
  text "LIFE" at 2675,1590 h110
  text "GOES ON" at 2755,1505 h110
  text "Operate Carefully" at 3228,1504 h70
  text "Battery CR1220" at 589,1401 h80
  text "Lamp Neon" at 3149,544 h80
  text "Lamp Neon" at 5567,534 h80
  text "Infrared Receiver" at 4475,340 h80
  text "Advice:" at 3305,43.99 h80
  text "Please give priority to the boost module and make sure it is working properly." at 3000,43.2 h75
  text "Pay attention that this clock shall only be touched by people who have the knowledge of Electronics." at 7345,42.27 h75
  text "Causion:" at 7685,40 h80

## Text inside footprints (layer, text, board x,y; h text height)
C6: Mechanical 1 "C1" at 7401.71,1931.16 h30 r90
C7: Mechanical 1 "C1" at 7026.71,1931.16 h30 r90
LED1: Mechanical 1 "C1" at 1306.71,846.56 h29.53 r90
LED2: Mechanical 1 "C1" at 2306.71,846.56 h29.53 r90
LED3: Mechanical 1 "C1" at 3746.71,846.56 h29.53 r90
LED4: Mechanical 1 "C1" at 4746.71,846.56 h29.53 r90
LED5: Mechanical 1 "C1" at 6186.71,846.56 h29.53 r90
LED6: Mechanical 1 "C1" at 7186.71,846.56 h29.53 r90
Q1: Mechanical 1 "U1" at 2816.69,747.17 h23.62 r180
Q2: Mechanical 1 "U1" at 2856.2,927.83 h23.62
Q4: Mechanical 1 "U1" at 5255.69,747.17 h23.62 r180
Q5: Mechanical 1 "U1" at 5295.2,926.83 h23.62
Q6: Mechanical 15 "1" at 6854.71,2181.47 h29.53 r90